# EAGLE board DragonBoard-sub-board-backup (EAGLE 7.6.0)
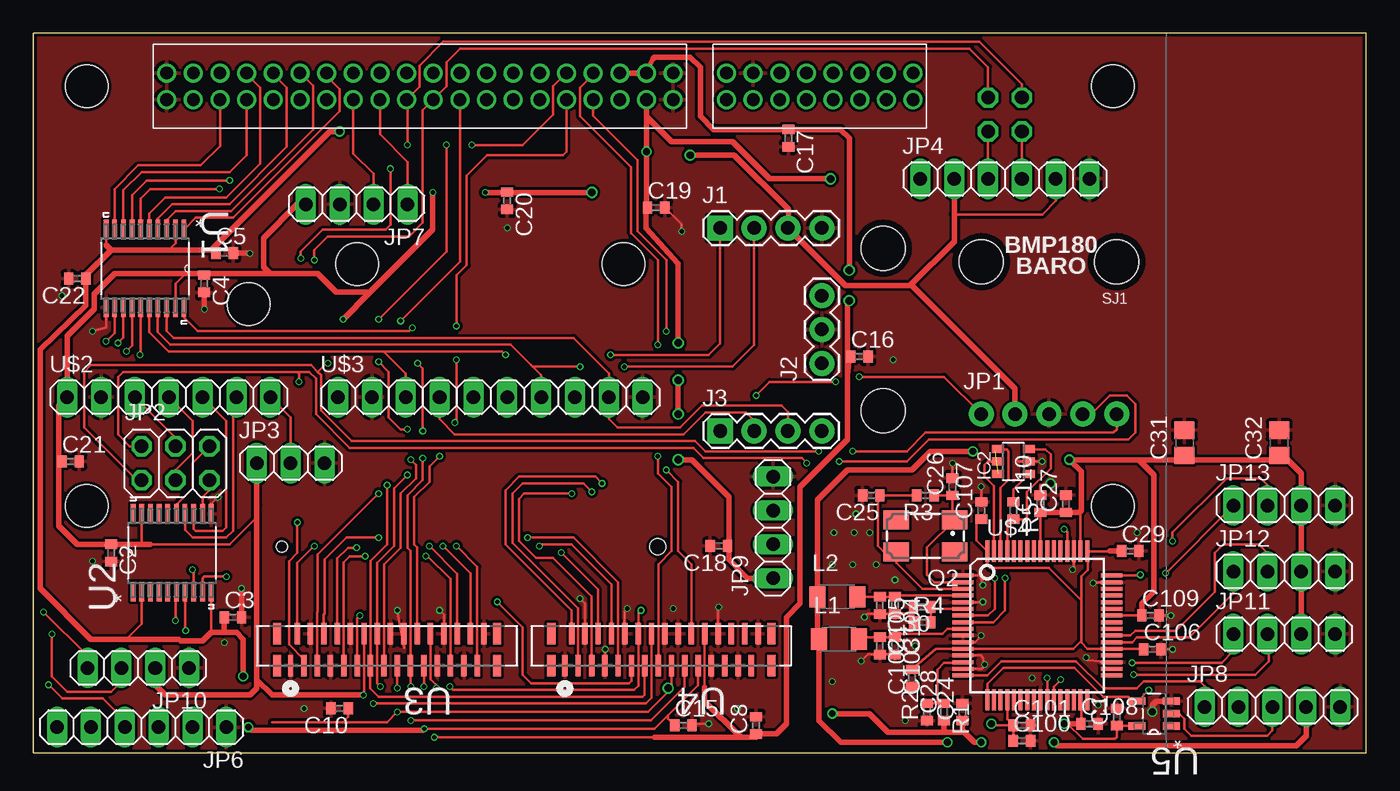
[diagram p0: board, top side]
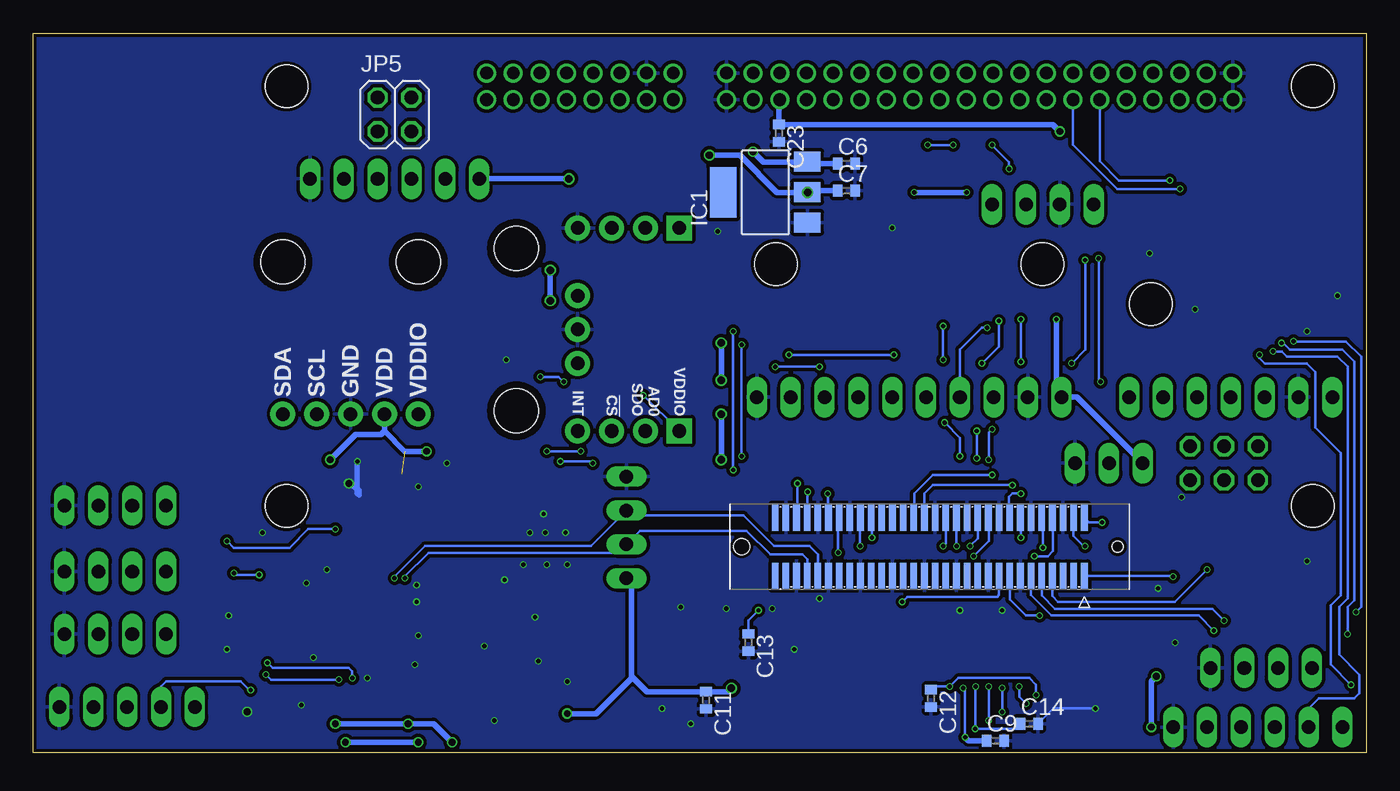
[diagram p1: board, bottom side, seen from below]

Size 100 x 53.98 mm. Coordinates in mm from the lower left corner, seen from the top.
Outline: 0,0 100,0 100,53.98 0,53.98 0,0
Copper layers (1*16): Top 0.035mm / dielectric 1.5mm / Bottom 0.035mm
Design rules "EagleRules-2-Layer-Shep": minimum track width 6mil, minimum drill 12mil, track to track 6mil, track to pad 6mil, pad to pad 6mil, via to via 6mil, smd to smd 0mil, copper to edge 10mil, drill to drill 10mil, minimum pad ring 2mil, minimum via ring 2mil, stop-mask expansion 2mil, vias tented up to drill 100mil, thermal gap 10mil
Net classes: 3 gnd: width 0.152 mm

## Footprints (pad centres in the part's own frame; a part is rotated, then mirrored left to right if it is on the bottom)
C0402 = smd 0.7 x 0.9: 1 -0.65,0; 2 0.65,0
C0805 = smd 1.3 x 1.5: 1 -0.95,0; 2 0.95,0
SOT223 = smd 1.499 x 2.007: 1 -2.261,-3.15; 2 0.025,-3.15; 3 2.311,-3.15 | smd 3.81 x 2.007: 4 0,3.15
SOT23-6 = smd 0.6 x 0.9: 1 -0.95,-1.15; 2 0,-1.15; 3 0.95,-1.15; 4 0.95,1.15; 5 0,1.15; 6 -0.95,1.15
1X04 = drill 1.016 pad 1.88 square: 1 0,0 | drill 1.016 pad 1.88: 2 2.54,0; 3 5.08,0; 4 7.62,0
1X03 = drill 1.016 pad 1.88: 1 0,0; 2 2.54,0; 3 5.08,0
1X05_ROUNDONLY_NOSILK = drill 1.016 pad 1.88: 1 0,0; 2 2.54,0; 3 5.08,0; 4 7.62,0; 5 10.16,0
2X03 = drill 1.016 octagon: 1 -2.54,-1.27; 2 -2.54,1.27; 3 0,-1.27; 4 0,1.27; 5 2.54,-1.27; 6 2.54,1.27
1X03' = drill 1.016 long: 1 -2.54,0; 2 0,0; 3 2.54,0
1X06 = drill 1.016 long: 1 -6.35,0; 2 -3.81,0; 3 -1.27,0; 4 1.27,0; 5 3.81,0; 6 6.35,0
2X02 = drill 1.016 octagon: 1 -1.27,-1.27; 2 -1.27,1.27; 3 1.27,-1.27; 4 1.27,1.27
1X04' = drill 1.016 long: 1 -3.81,0; 2 -1.27,0; 3 1.27,0; 4 3.81,0
1X05 = drill 1.016 long: 1 -5.08,0; 2 -2.54,0; 3 0,0; 4 2.54,0; 5 5.08,0
L3216C = smd 1.2 x 1.6: 1 -1.5,0; 2 1.5,0
CTS406 = smd 1.9 x 1.4: 1 -2.2,-1.2; 2 2.2,-1.2; 3 2.2,1.2; 4 -2.2,1.2
R0402 = smd 0.7 x 0.9: 1 -0.65,0; 2 0.65,0
STAND-OFF = hole 3.302: 0,0
SOP65P640X120-20N = smd 1.473 x 0.356: 1 -2.921,2.921; 2 -2.921,2.286; 3 -2.921,1.626; 4 -2.921,0.965; 5 -2.921,0.33; 6 -2.921,-0.33; 7 -2.921,-0.965; 8 -2.921,-1.626; 9 -2.921,-2.286; 10 -2.921,-2.921; 11 2.921,-2.921; 12 2.921,-2.286; 13 2.921,-1.626; 14 2.921,-0.965; 15 2.921,-0.33; 16 2.921,0.33; 17 2.921,0.965; 18 2.921,1.626; 19 2.921,2.286; 20 2.921,2.921
FCI_62674-301121ALF = smd 0.406 x 1.6: 1 0,4.775; 2 -0.508,2.388; 3 -0.991,4.775; 4 -1.499,2.388; 5 -2.007,4.775; 6 -2.489,2.388; 7 -2.997,4.775; 8 -3.505,2.388; 9 -3.988,4.775; 10 -4.496,2.388; 11 -5.004,4.775; 12 -5.512,2.388; 13 -5.994,4.775; 14 -6.502,2.388; 15 -7.01,4.775; 16 -7.493,2.388; 17 -8.001,4.775; 18 -8.509,2.388; 19 -8.992,4.775; 20 -9.5,2.388; 21 -10.008,4.775; 22 -10.49,2.388; 23 -10.998,4.775; 24 -11.506,2.388; 25 -11.989,4.775; 26 -12.497,2.388; 27 -13.005,4.775; 28 -13.487,2.388; 29 -13.995,4.775; 30 -14.503,2.388 | smd 0.61 x 1.6: 31 -15.494,2.388; 32 1.016,2.388; 33 -15.494,4.775; 34 1.016,4.775
SOT95P280X145-5N = smd 1.27 x 0.559: 1 -1.295,0.94; 2 -1.295,0; 3 -1.295,-0.94; 4 1.295,-0.94; 5 1.295,0.94
DROGENBOARD-TH = drill 0.95: A1 52,49; A2 52,51; A3 54,49; A4 54,51; A5 56,49; A6 56,51; A7 58,49; A8 58,51; A9 60,49; A10 60,51; A11 62,49; A12 62,51; A13 64,49; A14 64,51; A15 66,49; A16 66,51; LS1 10,49; LS2 10,51; LS3 12,49; LS4 12,51; LS5 14,49; LS6 14,51; LS7 16,49; LS8 16,51; LS9 18,49; LS10 18,51; LS11 20,49; LS12 20,51; LS13 22,49; LS14 22,51; LS15 24,49; LS16 24,51; LS17 26,49; LS18 26,51; LS19 28,49; LS20 28,51; LS21 30,49; LS22 30,51; LS23 32,49; LS24 32,51; LS25 34,49; LS26 34,51; LS27 36,49; LS28 36,51; LS29 38,49; LS30 38,51; LS31 40,49; LS32 40,51; LS33 42,49; LS34 42,51; LS35 44,49; LS36 44,51; LS37 46,49; LS38 46,51; LS39 48,49; LS40 48,51 | smd 0.5 x 2 bottom: HS1 21.15,13.25; HS2 21.15,17.65; HS3 21.95,13.25; HS4 21.95,17.65; HS5 22.75,13.25; HS6 22.75,17.65; HS7 23.55,13.25; HS8 23.55,17.65; HS9 24.35,13.25; HS10 24.35,17.65; HS11 25.15,13.25; HS12 25.15,17.65; HS13 25.95,13.25; HS14 25.95,17.65; HS15 26.75,13.25; HS16 26.75,17.65; HS17 27.55,13.25; HS18 27.55,17.65; HS19 28.35,13.25; HS20 28.35,17.65; HS21 29.15,13.25; HS22 29.15,17.65; HS23 29.95,13.25; HS24 29.95,17.65; HS25 30.75,13.25; HS26 30.75,17.65; HS27 31.55,13.25; HS28 31.55,17.65; HS29 32.35,13.25; HS30 32.35,17.65; HS31 33.15,13.25; HS32 33.15,17.65; HS33 33.95,13.25; HS34 33.95,17.65; HS35 34.75,13.25; HS36 34.75,17.65; HS37 35.55,13.25; HS38 35.55,17.65; HS39 36.35,13.25; HS40 36.35,17.65; HS41 37.15,13.25; HS42 37.15,17.65; HS43 37.95,13.25; HS44 37.95,17.65; HS45 38.75,13.25; HS46 38.75,17.65; HS47 39.55,13.25; HS48 39.55,17.65; HS49 40.35,13.25; HS50 40.35,17.65; HS51 41.15,13.25; HS52 41.15,17.65; HS53 41.95,13.25; HS54 41.95,17.65; HS55 42.75,13.25; HS56 42.75,17.65; HS57 43.55,13.25; HS58 43.55,17.65; HS59 44.35,13.25; HS60 44.35,17.65 | hole 0.85: 18.65,15.45 | hole 1.215: 46.85,15.45 | hole 3.2: 4,18.5; 4,50; 81,18.5; 81,50
BURO = drill 1.016 long: 1 -7.62,0; 2 -5.08,0; 3 -2.54,0; 4 0,0; 5 2.54,0; 6 5.08,0; 7 7.62,0 | hole 3.2: 6,7
IMU = drill 1.016 long: 1 -11.43,0; 2 -8.89,0; 3 -6.35,0; 4 -3.81,0; 5 -1.27,0; 6 1.27,0; 7 3.81,0; 8 6.35,0; 9 8.89,0; 10 11.43,0 | hole 3.2: 10,10; -10,10
LQFP-64 = smd 0.3 x 1.6: 1 -3.25,-5.825; 2 -2.75,-5.825; 3 -2.25,-5.825; 4 -1.75,-5.825; 5 -1.25,-5.825; 6 -0.75,-5.825; 7 -0.25,-5.825; 8 0.25,-5.825; 9 0.75,-5.825; 10 1.25,-5.825; 11 1.75,-5.825; 12 2.25,-5.825; 13 2.75,-5.825; 14 3.25,-5.825; 15 3.75,-5.825; 16 4.25,-5.825; 33 4.25,5.325; 34 3.75,5.325; 35 3.25,5.325; 36 2.75,5.325; 37 2.25,5.325; 38 1.75,5.325; 39 1.25,5.325; 40 0.75,5.325; 41 0.25,5.325; 42 -0.25,5.325; 43 -0.75,5.325; 44 -1.25,5.325; 45 -1.75,5.325; 46 -2.25,5.325; 47 -2.75,5.325; 48 -3.25,5.325 | smd 1.6 x 0.3: 17 6.075,-4; 18 6.075,-3.5; 19 6.075,-3; 20 6.075,-2.5; 21 6.075,-2; 22 6.075,-1.5; 23 6.075,-1; 24 6.075,-0.5; 25 6.075,0; 26 6.075,0.5; 27 6.075,1; 28 6.075,1.5; 29 6.075,2; 30 6.075,2.5; 31 6.075,3; 32 6.075,3.5; 49 -5.075,3.5; 50 -5.075,3; 51 -5.075,2.5; 52 -5.075,2; 53 -5.075,1.5; 54 -5.075,1; 55 -5.075,0.5; 56 -5.075,0; 57 -5.075,-0.5; 58 -5.075,-1; 59 -5.075,-1.5; 60 -5.075,-2; 61 -5.075,-2.5; 62 -5.075,-3; 63 -5.075,-3.5; 64 -5.075,-4

## Placement (x,y rotation side)
C1  0.1uF  [C0402]  81.28,2.67 90 top
C2  0.1Uf  [C0402]  5.84,14.99 270 top
C3  0.1Uf  [C0402]  14.99,10.16 0 top
C4  0.1uF  [C0402]  12.83,35.18 270 top
C5  0.1uF  [C0402]  14.35,37.47 0 top
C6  1uF  [C0402]  38.99,44.2 0 bottom
C7  1uF  [C0402]  38.99,42.16 0 bottom
C8  0.1uF  [C0402]  54.23,2.03 90 top
C9  0.1uF  [C0402]  27.81,0.89 0 bottom
C10  0.1uF  [C0402]  22.99,3.3 180 top
C11  0.1uF  [C0402]  49.53,3.94 270 bottom
C12  0.1uF  [C0402]  32.64,4.06 270 bottom
C13  0.1uF  [C0402]  46.35,8.26 270 bottom
C14  0.1uF  [C0402]  25.27,2.16 0 bottom
C15  0.1uF  [C0402]  48.77,2.03 0 top
C16  0.1uF  [C0402]  61.98,29.72 0 top
C17  0.1uF  [C0402]  56.64,46.1 270 top
C18  0.1uF  [C0402]  51.44,15.49 180 top
C19  0.1uF  [C0402]  46.74,40.89 0 top
C20  0.1uF  [C0402]  35.56,41.4 270 top
C21  0.1uF  [C0402]  2.79,21.84 0 top
C22  0.1uF  [C0402]  3.3,35.56 180 top
C23  0.1uF  [C0402]  44.07,46.48 270 bottom
C24  0.1uF  [C0402]  69.72,3.05 90 top
C25  30pF  [C0402]  62.87,19.3 180 top
C26  30pF  [C0402]  68.96,19.94 90 top
C27  4.7uF  [C0402]  77.47,18.67 90 top
C28  0.1uF  [C0402]  65.91,5.59 270 top
C29  4.7uF  [C0402]  82.3,15.11 0 top
C30  0.1uF  [C0402]  66.67,10.92 180 top
C31  0.1uF  [C0805]  86.36,23.24 90 top
C32  0.1uF  [C0805]  93.47,23.24 90 top
C100  0.1uF  [C0402]  74.17,0.89 0 top
C101  4.7uF  [C0402]  74.17,2.03 0 top
C102  0.1uF  [C0402]  63.5,8 270 top
C103  4.7uF  [C0402]  64.64,8 270 top
C104  0.1uF  [C0402]  64.64,11.05 270 top
C105  4.7uF  [C0402]  63.5,11.05 270 top
C106  0.1uF  [C0402]  83.95,7.75 0 top
C107  0.1uF  [C0402]  71.12,18.16 90 top
C108  0.1uF  [C0402]  79.25,2.16 0 top
C109  0.1uF  [C0402]  83.82,10.29 0 top
C110  0.1uF  [C0402]  75.56,18.67 90 top
IC1  REG1117  [SOT223]  45.09,42.04 90 bottom
IC2  93AA76A  [SOT23-6]  73.53,21.84 90 top
J1  [1X04]  51.54,39.37 0 top
J2  [1X03]  59.16,29.21 90 top
J3  [1X04]  51.54,24.13 0 top
JP1  [1X05_ROUNDONLY_NOSILK]  71.12,25.4 0 top
JP2  [2X03]  10.67,21.72 0 top
JP3  [1X03']  19.3,21.72 0 top
JP4  [1X06]  72.9,43.05 0 top
JP5  [2X02]  72.9,47.88 0 bottom
JP6  [1X06]  8.13,1.91 180 top
JP7  [1X04']  24.26,41.15 180 top
JP8  [1X05]  92.96,3.43 0 top
JP9  [1X04']  55.5,16.89 90 top
JP10  [1X04']  7.87,6.35 180 top
JP11  [1X04']  93.85,8.89 0 top
JP12  [1X04']  93.85,13.59 0 top
JP13  [1X04']  93.85,18.54 0 top
L1  0.1uH  [L3216C]  60.45,8.51 0 top
L2  0.1uH  [L3216C]  60.33,11.68 0 top
Q2  12MHz  [CTS406]  66.93,16.26 180 top
R1  1K  [R0402]  68.33,3.05 270 top
R2  100k  [R0402]  67.06,3.05 90 top
R3  100k  [R0402]  66.93,19.3 180 top
R4  12k  [R0402]  66.67,9.78 0 top
R5  22k  [R0402]  73.53,18.16 270 top
STANDOFF1  STAND-OFF  [STAND-OFF]  81.28,36.83 0 top
STANDOFF2  STAND-OFF  [STAND-OFF]  71.12,36.83 0 top
STANDOFF3  STAND-OFF  [STAND-OFF]  63.75,25.65 0 top
STANDOFF4  STAND-OFF  [STAND-OFF]  63.75,37.85 0 top
U1  TXB0108PWR  [SOP65P640X120-20N]  8.38,36.32 270 top
U2  TXB0108PWR  [SOP65P640X120-20N]  10.41,14.99 90 top
U3  62674-301121ALF  [FCI_62674-301121ALF]  19.3,11.3 180 top
U4  62674-301121ALF  [FCI_62674-301121ALF]  39.88,11.3 180 top
U5  NC7ST04M5X  [SOT95P280X145-5N]  84.07,2.92 180 top
U$1  DRAGON-BOARD-TH  [DROGENBOARD-TH]  0,0 0 top
U$2  GY-63  [BURO]  10.16,26.67 0 top
U$3  GY-9250  [IMU]  34.29,26.67 0 top
U$4  FT423H  [LQFP-64]  75.56,10.03 270 top

## Library data of the parts
C1-C32 C100-C110 L1 L2 R1-R5 = rcl
IC1 = burr-brown; MPN: REG1117; OC_FARNELL: 1097566; OC_NEWARK: 14P6981
IC2 = microchip; MPN: 93AA76AT-I/OT; OC_FARNELL: 1331443; OC_NEWARK: 35M2481
J1 J3 = SparkFun-Connectors; PROD_ID: CONN-09696
J2 = SparkFun-Connectors
JP1 = mike-temp
JP2-JP13 = pinhead
Q2 = crystal; OC_FARNELL: unknown; OC_NEWARK: unknown
STANDOFF1-STANDOFF4 = SparkFun-Electromechanical
U1 U2 = Texas Instruments_By_element14_Batch_1; MPN: TXB0108PWR; OC_FARNELL: 1494945; OC_NEWARK: 27M1151; PACKAGE: TSSOP-20; SUPPLIER: Texas Instruments
U3 U4 = 62674-301121ALF; MPN: 62674-301121ALF; OC_FARNELL: 1830632; OC_NEWARK: 03M2163; PACKAGE: CONN-30POS; SUPPLIER: FCI
U5 = pca9685; MPN: NC7ST04M5X; OC_FARNELL: -; OC_NEWARK: 38C7556; PACKAGE: SOT-23-5; SUPPLIER: Fairchild
U$1 = DragonBoard
U$2 U$3 = imu
U$4 = FT432H

## Nets
+1.8V: C3.1 C5.1 C14.1 C15.1 C22.1 C23.1 U1.2 U1.10 U2.2 U2.10 U3.21 U4.21 U$1.LS35
+3.3V: C1.1 C2.1 C4.1 C7.1 C12.1 C13.1 C20.1 C21.1 C27.1 C31.1 C32.1 C100.1 C101.1 C108.1 C109.1 C110.1 IC1.2 IC2.6 J1.3 JP1.2 JP3.1 JP4.2 JP4.5 JP7.4 JP10.2 JP11.3 JP12.3 JP13.3 L1.1 L2.1 U1.19 U2.19 U3.12 U4.12 U5.5 U$2.1 U$3.1 U$4.20 U$4.31 U$4.42 U$4.50 U$4.56
+5V: C6.1 C10.1 C11.1 C18.1 C19.1 C24.1 IC1.3 JP4.1 JP8.4 JP9.1 R1.2 U3.17 U4.17 U$1.LS37
ADBUS_RX: JP8.2 U5.4 U$4.17
ADBUS_TX: JP8.1 U$4.16
AUX_CL: J2.1
AUX_DA: J2.3
BDBUS_RX: JP11.2 U$4.27
BDBUS_TX: JP11.1 U$4.26
CAM_SCL: U3.13 U4.13 U$1.HS32
CAM_SDA: U3.14 U4.14 U$1.HS34
CDBUS_RX: JP12.2 U$4.39
CDBUS_TX: JP12.1 U$4.38
CDC_HPH_L: U$1.A10
CDC_HPH_R: U$1.A8
CDC_HPH_REF: U$1.A9
CDC_HS_DET: U$1.A11
CDC_MIC2_P: U$1.A6
CDC_MIC3_P: U$1.A7
CDC_MIC_BIAS1: U$1.A12
CON_RX: JP6.4 U1.15
CON_TX: JP6.5 U1.14
CSI0_C+: U3.3 U$1.HS2
CSI0_C-: U3.2 U$1.HS4
CSI0_D0+: U3.9 U$1.HS8
CSI0_D0-: U3.8 U$1.HS10
CSI0_D1+: U3.6 U$1.HS14
CSI0_D1-: U3.5 U$1.HS16
CSI0_D2+: U3.25 U$1.HS20
CSI0_D2-: U3.26 U$1.HS22
CSI0_D3+: U3.28 U$1.HS26
CSI0_D3-: U3.29 U$1.HS28
CSI1_C+: U4.3 U$1.HS54
CSI1_C-: U4.2 U$1.HS56
CSI1_D0+: U4.9 U$1.HS42
CSI1_D0-: U4.8 U$1.HS44
CSI1_D1+: U4.6 U$1.HS48
CSI1_D1-: U4.5 U$1.HS50
DDBUS_RX: JP13.2 U$4.52
DDBUS_TX: JP13.1 U$4.48
DSI_BLCTRL: U$1.LS28
DSI_CLK+: U$1.HS21
DSI_CLK-: U$1.HS23
DSI_D0+: U$1.HS27
DSI_D0-: U$1.HS29
DSI_D1+: U$1.HS33
DSI_D1-: U$1.HS35
DSI_D2+: U$1.HS39
DSI_D2-: U$1.HS41
DSI_D3+: U$1.HS45
DSI_D3-: U$1.HS47
EECLK: IC2.4 U$4.62
EECS: IC2.5 U$4.63
EEDATA: IC2.3 R5.2 U$4.61
FLASH: U3.19 U4.19 U$1.LS23
GND: C1.2 C2.2 C3.2 C4.2 C5.2 C6.2 C7.2 C8.2 C9.2 C10.2 C11.2 C12.2 C13.2 C14.2 C15.2 C16.2 C17.2 C18.2 C19.2 C20.2 C21.2 C22.2 C23.2 C24.2 C25.2 C26.2 C27.2 C28.2 C29.2 C30.2 C31.2 C32.2 C100.2 C101.2 C102.2 C103.2 C104.2 C105.2 C106.2 C107.2 C108.2 C109.2 C110.2 IC1.1 IC2.2 J1.4 J2.2 JP1.3 JP3.3 JP4.6 JP6.1 JP7.3 JP8.5 JP9.4 JP10.1 JP11.4 JP12.4 JP13.4 R2.1 R4.1 U1.11 U2.11 U3.1 U3.4 U3.7 U3.10 U3.16 U3.18 U3.23 U3.24 U3.27 U3.30 U4.1 U4.4 U4.7 U4.10 U4.16 U4.18 U4.23 U4.24 U4.27 U4.30 U5.3 U$1.A4 U$1.HS6 U$1.HS12 U$1.HS13 U$1.HS18 U$1.HS19 U$1.HS24 U$1.HS25 U$1.HS30 U$1.HS31 U$1.HS37 U$1.HS43 U$1.HS46 U$1.HS49 U$1.HS52 U$1.HS55 U$1.HS58 U$1.LS1 U$1.LS2 U$1.LS39 U$1.LS40 U$2.2 U$3.2 U$3.10 U$4.1 U$4.5 U$4.10 U$4.11 U$4.13 U$4.15 U$4.25 U$4.35 U$4.47 U$4.51
GND_CFILT: U$1.A5
GPIO_12: U$1.LS24
GPIO_13: U$1.LS25
GPIO_24: U$1.LS29
GPIO_25: U$1.LS30
GPIO_69: U$1.LS26
GPIO_110: U$1.LS16
GPIO_113: U$1.LS18
GPIO_114: U$1.LS20
GPIO_115: U$1.LS27
HSIC_DATA: U$1.HS59
HSIC_STR: U$1.HS57
I2C0_SCL: JP7.2 U$1.LS15
I2C0_SDA: JP7.1 U$1.LS17
I2C1_SCL: JP1.4 JP2.2 JP5.2 U$1.LS19
I2C1_SDA: JP1.5 JP2.1 JP5.4 U$1.LS21
I2C3_SCL: U$1.HS36
I2C3_SDA: U$1.HS38
INT: J3.4
MCLK0: U3.11 U$1.HS15
MCLK1: U4.11 U$1.HS17
N$1: JP3.2 U$2.7
N$2: JP2.3 U$2.4
N$3: JP2.4 U$2.3
N$4: JP4.4 JP5.1
N$5: JP4.3 JP5.3
N$6: C30.1 R4.2 U$4.6
N$7: C26.1 Q2.1 R3.1 U$4.2
N$8: U$3.5
N$9: U$1.A15
N$10: U$3.6
N$11: C25.1 Q2.3 R3.2 U$4.3
N$12: U$3.8
N$14: IC2.1 R5.1
N$17: R1.1 R2.2 U$4.14
ON: U$1.LS4
RESET0: U3.20 U$1.LS31
RESET1: U4.20 U$1.LS33
RESIN: U$1.LS6
SBUS: JP8.3 U5.2
SPI0_CLK: U1.5 U$1.LS8
SPI0_CS_N: U1.3 U$1.LS12
SPI0_MISO: U1.4 U$1.LS10
SPI0_MOSI: U1.1 U$1.LS14
SPI1_CLK: U2.6 U$1.HS9
SPI1_CS: U2.8 U$1.HS7
SPI1_MISO: U2.7 U$1.HS11
SPI1_MOSI: U2.9 U$1.HS1
SPI_A_CLK: J1.1 U1.16 U$3.3
SPI_A_CS: J3.3 U1.18 U$3.9
SPI_A_MISO: J1.2 U1.17 U$3.7
SPI_A_MOSI: J3.2 U1.20 U$3.4
SPI_B_CLK: JP2.6 U2.15
SPI_B_CS: U2.13 U$2.5
SPI_B_MISO: U2.14 U$2.6
SPI_B_MOSI: JP2.5 U2.12
SPKR_OUT_M: U$1.A2
SPKR_OUT_P: U$1.A1
STANDBY0: U3.15 U$1.LS32
STANDBY1: U4.15 U$1.LS34
SYS_DCIN: C8.1 C9.1 C16.1 C17.1 U3.22 U4.22 U$1.LS36 U$1.LS38
TLE_RX: JP10.3 U1.13
TLE_TX: JP10.4 U1.12
UART0_CTS: U$1.LS3
UART0_RX: U1.8 U$1.LS7
UART0_TX: U1.9 U$1.LS5
UART1_RX: U1.6 U$1.LS13
UART1_TX: U1.7 U$1.LS11
UART_RTS: U$1.LS9
USB_D+: JP9.3 U$1.HS51 U$4.8
USB_D-: JP9.2 U$1.HS53 U$4.7
VCORE: C28.1 C29.1 C106.1 C107.1 U$4.12 U$4.37 U$4.49 U$4.64
VDDIO: J3.1 JP1.1
VPH_PWR: U$1.A3
VPHY: C104.1 C105.1 L2.2 U$4.4
VPLL: C102.1 C103.1 L1.2 U$4.9

## Tracks (layer width: path | path; a pad name or v marks a point on that pad's centre or on a via)
+1.8V  (via drill 0.33, 0.51)
  Top 0.203: U3.21 v29.31,4.95 | U4.21 49.89,5.05 47.62,2.79 | 47.62,2.79 46.61,1.78 v29.34,1.78 | U2.10 13.34,9.02 | U1.10 5.46,38.1 | U1.2 10.67,38.23 10.16,37.72 | 7.11,8.51 6.99,8.51 8.13,9.65 U2.2 | C15.1 47.62,2.52 47.62,2.79 | C22.1 3.94,35.58 3.94,35.69
  Top 0.406: 13.34,37.72 13.46,37.72 C5.1 | 5.84,37.72 10.16,37.72 11.94,37.72 13.34,37.72 | 5.46,38.1 5.84,37.72 | 5.84,37.72 3.94,35.81 3.94,35.69 3.94,33.53 0.51,30.23 0.51,12.32 4.32,8.51 7.11,8.51 10.92,8.51 11.05,8.38 12.7,8.38 13.34,9.02 14.22,9.02 | v29.34,1.78 29.21,1.65 16.38,1.65 v16.13,1.91 | v15.75,5.71 15.75,8.51 15.24,9.02 14.22,9.02 | C3.1 14.34,9.13 14.22,9.02 | v22.99,46.61 22.23,46.61 13.34,37.72
  Bottom 0.203: v29.31,4.95 29.34,4.93 v29.34,1.78 26.3,1.78 C14.1
  Bottom 0.406: v16.13,1.91 16.13,5.33 v15.75,5.71 | U$1.LS35 44.07,48.93 C23.1 23.51,47.13 v22.99,46.61
+3.3V  (via drill 0.33, 0.51, 0.56)  (1 unrouted)
  Top 0.203: v31.24,4.95 31.5,4.7 45.09,4.7 45.39,5 U4.12 45.39,10.46 v45.59,10.67 | U3.12 24.82,4.37 v24.77,4.32 | 8.76,15.62 14.73,15.62 16.76,17.65 16.76,18.54 | 8.13,15.62 U2.19 | U1.19 10.67,35.18 11.43,35.94 11.81,35.94 | 69.09,40.39 75.69,40.39 76.71,41.4 JP4.5 | C21.1 2.02,21.97 1.91,21.97 | C20.1 35.55,42.04 35.31,42.04 | C110.1 U$4.56 | U$4.42 C109.1 | U$4.31 78.61,3.91 78.61,2.05 C108.1 | U$4.20 73.06,2.48 C101.1 | C100.1 C101.1 | U5.5 82.74,2.02 C1.1 81.28,1.14 81.15,1.02 78.74,1.02 77.6,2.16 v77.34,2.16 | U$4.50 78.56,18.24 78.61,18.29 | C101.1 72.01,2.03 v71.88,2.16
  Top 0.406: JP1.2 73.66,27.3 65.91,35.05 65.79,35.05 | 65.79,35.05 60.94,35.05 J1.3 56.64,39.4 56.64,40.77 52.58,44.83 v49.28,44.83 | v41.91,42.04 35.31,42.04 v33.91,42.04 | v29.97,42.04 29.97,39.24 25.21,34.48 | 25.21,34.48 v23.24,32.51 | 12.57,35.94 11.81,35.94 6.1,35.94 4.57,34.42 4.57,33.27 2.54,31.24 U$2.1 1.91,26.04 1.91,21.97 1.91,17.02 3.3,15.62 5.84,15.62 | 12.57,35.94 17.78,35.94 | 17.78,35.94 21.34,35.94 22.73,34.54 25.15,34.54 25.21,34.48 | 16.76,5.46 17.91,4.32 v24.77,4.32 | 16.76,5.46 16.76,18.54 JP3.1 | JP4.2 69.09,40.39 69.09,38.35 65.79,35.05 | 8.76,15.62 8.13,15.62 5.84,15.62 | JP7.4 19.81,41.15 17.27,38.61 17.27,36.45 17.78,35.94 | C2.1 5.84,15.62 | C4.1 12.69,35.83 12.57,35.94 | 16.76,5.46 16.76,4.83 16.26,4.32 9.91,4.32 9.14,5.08 JP10.2 | C109.1 83.19,10.27 83.19,11.18 84.07,12.06 84.07,20.83 82.93,21.97 | 73.39,0.76 C100.1 | C108.1 v77.34,2.16 | 82.93,21.97 v77.72,21.97 78.61,21.08 78.61,18.29 78.61,18.16 78.47,18.02 C27.1 C110.1 | v70.48,22.61 67.31,22.61 65.91,21.21 61.09,21.21 58.83,18.95 L2.1 58.83,8.64 L1.1 58.95,2.39 60.58,0.76 v68.58,0.76 | JP11.3 JP12.3 JP13.3 95.12,20.95 94.11,21.97 | 94.11,21.97 86.36,21.97 | 86.36,21.97 82.93,21.97 | C31.1 86.36,21.97 | 94.11,21.97 93.79,22.29 C32.1
  Bottom 0.203: v24.77,4.32 24.77,5.08 25.27,5.59 30.61,5.59 v31.24,4.95 32.4,4.95 C12.1 | C13.1 46.35,9.91 v45.59,10.67
  Bottom 0.406: IC1.2 v41.91,42.04 | v33.91,42.04 v29.97,42.04 | v23.24,32.51 23.24,27.05 U$3.1 21.72,26.67 JP3.1 | v41.91,42.04 44.2,42.04 46.99,44.83 v49.28,44.83 | C7.1 41.78,42.16 v41.91,42.04 | v77.34,2.16 v71.88,2.16 69.98,2.16 v68.58,0.76 | JP1.2 73.66,24.13 | 73.66,24.13 73.91,23.88 75.82,23.88 v77.72,21.97 | v70.48,22.61 72.14,22.61 73.66,24.13
+5V  (via drill 0.33, 0.51, 0.56)
  Top 0.203: U3.17 v27.3,4.83 | U4.17 47.88,5.08 v47.62,4.83 47.62,4.57 46.1,3.05 v27.3,3.05 26.54,2.29 23.24,2.29 | C10.1 23.64,2.68 23.24,2.29 | 23.24,2.29 17.91,2.29 | C19.1 45.97,41.01
  Top 0.406: 45.97,41.02 45.97,41.01 | 45.97,41.01 45.97,39.37 48.39,36.7 v48.39,30.73 | v48.39,27.94 v48.39,25.4 | v48.39,21.97 49.4,21.97 52.2,19.18 52.2,15.49 | v59.82,43.05 55.24,43.05 52.45,45.85 47.88,45.85 46,47.73 | 52.2,15.49 52.2,14.48 53.59,13.08 JP9.1 | C18.1 52.2,15.49 | JP8.4 95.5,1.27 94.74,0.51 76.83,0.51 v76.58,0.76 | v71.12,0.76 70.61,0.76 69.85,1.52 | 69.85,1.52 69.72,1.65 C24.1 | v59.94,2.92 62.74,2.92 64.14,1.52 68.45,1.52 | 68.45,1.52 69.85,1.52 | R1.2 68.33,1.65 68.45,1.52 | 46,47.73 46,48.01 U$1.LS37 | 45.97,41.01 46,41.03 v46,45.09 46,47.73
  Bottom 0.203: v27.3,3.05 v27.3,4.83 | C11.1 49.52,4.57 48.9,4.57
  Bottom 0.406: v48.39,30.73 v48.39,27.94 | v48.39,25.4 v48.39,21.97 | v47.62,4.83 47.88,4.57 48.9,4.57 53.98,4.57 55.05,5.65 | JP4.1 v59.82,43.05 | C6.1 41.78,44.2 IC1.3 41.96,44.32 45.21,44.32 46,45.11 v46,45.09 | 55.05,5.65 55.12,5.71 55.12,12.7 JP9.1 | v59.94,2.92 57.78,2.92 55.05,5.65 | v76.58,0.76 v71.12,0.76
ADBUS_RX  (via drill 0.33)
  Top 0.203: U$4.17 71.56,5.14 72.77,6.35 78.11,6.35 80.26,4.19 82.17,4.19 82.5,3.86 U5.4 82.86,3.86 v83.69,4.7
  Bottom 0.203: v83.69,4.7 83.82,4.7 84.45,5.33 90.04,5.33 90.42,4.95 JP8.2
ADBUS_TX
  Top 0.203: U$4.16 71.57,5.78 72.64,6.86 78.23,6.86 80.26,4.83 82.8,4.83 83.31,5.33 87.5,5.33 87.88,4.95 JP8.1
BDBUS_RX  (via drill 0.33)
  Top 0.203: U$4.27 76.56,4.94 v77.09,5.46 | v82.55,5.84 91.69,5.84 92.71,6.86 92.71,8.76 JP11.2
  Bottom 0.203: v77.09,5.46 82.17,5.46 v82.55,5.84
BDBUS_TX  (via drill 0.33)
  Top 0.203: U$4.26 76.06,5.45 v76.07,5.59 | v82.42,6.73 89.15,6.73 90.04,7.62 JP11.1
  Bottom 0.203: v76.07,5.59 76.07,6.1 76.33,6.35 82.04,6.35 v82.42,6.73
CAM_SCL  (via drill 0.33)
  Top 0.203: v26.54,20.07 26.54,15.62 25.3,14.38 U3.13 25.27,6.5 25.27,4.83 25.91,4.19 45.72,4.19 45.87,4.34 U4.13
  Bottom 0.203: v26.54,20.07 32.51,20.07 33.15,19.43 U$1.HS32
CAM_SDA  (via drill 0.33)
  Top 0.203: v28.07,20.83 27.05,19.81 27.05,15.49 25.81,14.25 U3.14 25.81,5.18 v26.04,4.95 | U4.14 46.38,4.09 45.97,3.68 v25.53,3.68
  Bottom 0.203: v28.07,20.83 32.51,20.83 33.91,19.43 33.91,17.69 U$1.HS34 | v26.04,4.95 26.04,4.19 v25.53,3.68
CDBUS_RX
  Top 0.203: U$4.39 82.32,8.78 82.68,9.14 85.72,9.14 88.65,12.06 88.65,14.99 89.28,15.62 91.95,15.62 92.58,14.99 JP12.2
CDBUS_TX
  Top 0.203: U$4.38 82.45,8.28 82.8,8.64 86.74,8.64 90.04,11.94 JP12.1
CON_RX  (via drill 0.33)
  Top 0.203: U1.15 8.05,29.9 v8,29.84 | JP6.4 6.86,2.41 5.21,4.06 2.16,4.06 v1.14,5.08
  Bottom 0.203: v8,29.84 8,29.59 7.62,29.21 4.45,29.21 3.81,28.57 3.81,24.38 1.91,22.48 1.91,11.81 2.67,11.05 2.67,6.6 v1.14,5.08
CON_TX  (via drill 0.33)
  Top 0.203: U1.14 7.42,30.53 v6.99,30.1
  Bottom 0.203: v6.99,30.1 6.35,30.1 5.97,29.72 2.16,29.72 1.4,28.96 1.4,11.56 2.03,10.92 2.03,7.37 0.51,5.84 0.51,4.45 0.89,4.06 3.56,4.06 4.32,3.3 JP6.5
CSI0_C+  (via drill 0.33)
  Top 0.203: 20.3,6.88 U3.3 20.3,7.01 19.18,8.13 19.18,14.35 19.81,14.99 v19.81,17.27
  Bottom 0.203: v19.81,17.27 20.77,17.27 U$1.HS2
CSI0_C-  (via drill 0.33)
  Top 0.203: U3.2 19.81,14.22 v21.08,15.49
  Bottom 0.203: v21.08,15.49 21.21,15.49 21.97,16.26 21.97,17.63 U$1.HS4
CSI0_D0+  (via drill 0.33)
  Top 0.203: U3.9 23.29,14.28 23.75,14.73 v24.89,14.73
  Bottom 0.203: v24.89,14.73 23.88,14.73 23.5,15.11 23.5,17.59 U$1.HS8
CSI0_D0-  (via drill 0.33)
  Top 0.203: U3.8 22.81,14.55 23.62,15.37 v24.26,15.37
  Bottom 0.203: v24.26,15.37 24.26,17.53 24.26,17.56 U$1.HS10
CSI0_D1+  (via drill 0.33)
  Top 0.203: U3.6 21.79,10.36 21.84,10.41 21.84,14.48 23.5,16.13 v25.91,16.13
  Bottom 0.203: v25.91,16.13 25.91,17.61 U$1.HS14
CSI0_D1-  (via drill 0.33)
  Top 0.203: U3.5 21.31,10.52 21.34,10.54 21.34,14.86 v25.91,19.43
  Bottom 0.203: v25.91,19.43 26.54,19.43 26.8,19.18 26.8,17.7 U$1.HS16
CSI0_D2+  (via drill 0.33)
  Top 0.203: U3.25 31.29,13.03 29.59,14.73 v29.46,14.73
  Bottom 0.203: v29.46,14.73 28.32,15.88 28.32,17.62 U$1.HS20
CSI0_D2-  (via drill 0.33)
  Top 0.203: U3.26 31.8,13.41 v29.72,15.49
  Bottom 0.203: v29.72,15.49 29.15,16.06 U$1.HS22
CSI0_D3+  (via drill 0.33)
  Top 0.203: U3.28 32.79,13.44 v30.73,15.49
  Bottom 0.203: v30.73,15.49 30.73,17.63 U$1.HS26
CSI0_D3-  (via drill 0.33)
  Top 0.203: U3.29 33.3,13.95 v31.75,15.49
  Bottom 0.203: U$1.HS28 31.55,15.69 v31.75,15.49
CSI1_C+  (via drill 0.33)
  Top 0.203: U4.3 40.87,10.82 35.94,15.75 35.94,19.43 36.7,20.19 41.27,20.19 v41.91,19.56
  Bottom 0.203: v41.91,19.56 41.91,17.69 U$1.HS54
CSI1_C-  (via drill 0.33)
  Top 0.203: U4.2 40.39,10.67 35.43,15.62 35.43,19.68 36.45,20.7 42.16,20.7 v42.67,20.19
  Bottom 0.203: v42.67,20.19 42.67,18.03 | 42.67,18.03 42.67,17.73 | U$1.HS56 42.75,17.96 42.67,18.03
CSI1_D0+  (via drill 0.33)
  Top 0.203: U4.9 43.87,12.78 40.51,16.13 v37.08,16.13
  Bottom 0.203: v37.08,16.13 37.08,17.58 U$1.HS42
CSI1_D0-  (via drill 0.33)
  Top 0.203: U4.8 43.38,12.62 40.39,15.62 38.1,15.62 v37.97,15.49
  Bottom 0.203: v37.97,15.49 37.97,17.63 U$1.HS44
CSI1_D1+  (via drill 0.33)
  Top 0.203: U4.6 42.37,12.24 v39.62,14.99
  Bottom 0.203: v39.62,14.99 39.62,17.58 U$1.HS48
CSI1_D1-  (via drill 0.33)
  Top 0.203: U4.5 41.88,11.71 38.99,14.61 37.72,14.61 36.45,15.88 36.45,19.05 36.83,19.43 v40.39,19.43
  Bottom 0.203: v40.39,19.43 40.39,17.69 U$1.HS50
DDBUS_RX  (via drill 0.33)
  Top 0.203: U$4.52 77.56,16.54 v77.34,16.76 | v85.47,15.88 85.47,16.51 89.53,20.57 92.08,20.57 92.58,20.07 JP13.2
  Bottom 0.203: v77.34,16.76 79.38,16.76 80.77,15.37 84.96,15.37 v85.47,15.88
DDBUS_TX  (via drill 0.33)
  Top 0.203: U$4.48 83.01,13.28 v83.06,13.34 | v84.96,13.46 JP13.1
  Bottom 0.203: v83.06,13.34 84.84,13.34 v84.96,13.46
EECLK
  Top 0.203: U$4.62 72.56,19.86 73.15,20.45 73.15,22.61 73.03,22.73 72.44,22.73 IC2.4 72.45,22.86
EECS
  Top 0.203: U$4.63 72.06,20.01 71.37,20.7 71.37,21.59 71.63,21.84 IC2.5
EEDATA
  Top 0.203: U$4.61 73.06,17.04 R5.2 74.41,17.51 74.55,17.65 74.55,19.56 76.33,21.34 76.33,22.35 75.95,22.73 74.74,22.73 IC2.3 74.75,22.86
FLASH  (via drill 0.33)
  Top 0.203: U4.19 48.87,4.93 46.35,2.41 v28.32,2.41 | v28.32,4.95 28.32,6.5 U3.19 28.3,15.14 28.07,15.37 28.07,19.3 29.21,20.45 v29.21,22.1 | v27.56,32.38 32,36.83 U$1.LS23 | v28.83,29.21 29.21,28.83 v29.21,24.13
  Bottom 0.203: v28.32,2.41 v28.32,4.95 | v27.56,32.38 27.56,30.48 v28.83,29.21 | v29.21,22.1 v29.21,24.13
GND  (via drill 0.33, 0.51)
  Top 0.203: U3.24 30.81,10.34 v30.48,10.67 | U3.18 27.81,7.87 v27.3,10.67 | U4.10 44.37,10.59 v44.58,10.79 | U4.7 42.88,7.7 v42.93,7.75 | U4.4 41.38,11.2 v41.02,11.56 | U2.11 13.34,18.67 v13.84,19.18 | U4.24 51.38,10.87 v51.44,10.92 | U1.11 5.46,31.88 v4.45,31.62 | C15.2 49.55,2.16 v50.67,2.16 | C19.2 48.64,39.64 v48.64,39.12 | U$4.35 79.17,6.91 v78.99,7.11 | U$4.15 71.19,6.28 v71.37,6.6 71.25,7.11 71.08,7.28 U$4.13 | 71.1,8.78 v71.12,8.76 70.64,8.28 U$4.11 | U$4.5 71.23,11.28 v71.25,11.3 | U$4.1 71.05,13.28 v71.25,12.57 | U$4.51 78.06,13.8 v77.98,13.72 | U$4.47 79.58,12.78 v79.5,12.7 | C26.2 v68.96,21.72 | C107.2 v71.12,19.94 | 73.79,21.97 73.91,21.84 IC2.2 v75.69,21.84 | C110.2 75.56,20.07 | C106.2 v85.47,7.75 | C109.2 v85.34,10.29 | v62.36,10.16 62.6,10.4 C105.2 C104.2 65.91,10.4 66.03,10.29 | C102.2 C103.2 63.39,7.35 63.37,7.37 62.61,7.37 v62.1,6.86
  Top 0.406: C3.2 15.64,12.3 v15.62,12.32 | C4.2 v12.83,33.27 | C5.2 v16.26,37.47 | U5.3 84.25,3.86 83.95,3.56 v83.95,3.05
  Bottom 0.203: C14.2 23.48,3.3 v20.32,3.3
  Bottom 0.406: v75.69,21.84 75.69,19.45 C110.2 75.56,19.68 v76.33,20.19
  other vias: 48.01,10.79 14.35,8.26 4.45,14.35 35.56,39.37 2.16,34.29 64.52,29.46 52.83,3.3 74.93,5.59 82.8,16.51 61.72,17.91 64.64,12.95 59.94,5.33 65.41,2.41 66.17,8 59.94,14.1 61.47,14.1 63.25,14.1 62.74,16.51 61.59,16.51 60.07,16.51 79.88,3.56
  pour Bottom (isolate 0.254): -2.54,55.88 101.6,55.88 101.6,-7.62 -2.54,-7.62
  pour Top (isolate 0.203): 101.6,-3.81 -3.81,-3.81 -3.81,59.69 101.6,59.69
I2C0_SCL
  Top 0.203: U$1.LS15 24,44.96 25.53,43.43 JP7.2
I2C0_SDA
  Top 0.203: 28.19,41.27 JP7.1 28.07,44.32 26,46.39 U$1.LS17
I2C1_SCL  (via drill 0.33)
  Top 0.203: JP2.2 7.24,22.99 6.35,23.88 6.35,28.19 6.73,28.57 19.81,28.57 | 19.81,28.57 20.7,28.57 21.21,28.07 21.21,25.4 23.75,22.86 49.53,22.86 50.29,22.1 57.66,22.1 v58.04,21.72 | v19.94,27.81 19.94,28.45 19.81,28.57 | 74.17,49.4 JP5.2 74.17,50.16 70.99,53.34 30.73,53.34 28.98,51.56 28.98,49.96 U$1.LS19 28.07,48.93 v28.07,45.59 | v20.07,37.08 20.07,37.59 21.72,39.24 26.42,39.24 26.8,39.62 v26.8,43.81 | JP1.4 79.38,25.4 80.77,26.8 82.04,26.8 82.68,26.16 82.68,24 82.17,23.5 67.18,23.5 65.53,21.84 v60.45,21.84
  Bottom 0.203: v20.07,37.08 20.07,27.94 v19.94,27.81 | v60.45,21.84 58.17,21.84 v58.04,21.72 | v26.8,43.81 26.8,44.32 v28.07,45.59
I2C1_SDA  (via drill 0.33)
  Top 0.203: JP2.1 7.75,20.45 3.81,24.38 3.81,28.57 4.32,29.08 20.83,29.08 21.34,28.57 | 21.34,28.57 21.59,28.32 21.59,25.65 23.88,23.37 49.66,23.37 50.42,22.61 v58.93,22.61 | v22.1,29.21 21.97,29.21 21.34,28.57 | v21.08,36.96 21.08,37.72 22.1,38.73 28.19,38.73 29.21,39.75 29.21,48.21 U$1.LS21 30.99,49.99 30.99,51.82 32,52.83 70.23,52.83 71.63,51.44 JP5.4 | JP1.5 81.28,24.26 81.03,24 66.93,24 65.53,22.61 v61.47,22.61
  Bottom 0.203: v21.08,36.96 21.08,30.23 v22.1,29.21 | v61.47,22.61 v58.93,22.61
MCLK0  (via drill 0.33)
  Top 0.203: U3.11 24.31,10.08 v24.51,10.29
  Bottom 0.203: v24.51,10.29 25.53,10.29 26.75,11.51 U$1.HS15
MCLK1  (via drill 0.33)
  Top 0.203: v34.8,11.3 36.7,9.4 36.7,5.84 37.34,5.21 44.7,5.21 44.88,5.38 U4.11
  Bottom 0.203: v34.8,11.3 34.42,11.68 27.69,11.68 27.55,11.82 U$1.HS17
N$1
  Top 0.203: JP3.2 19.3,25.15 U$2.7
N$2
  Top 0.203: JP2.3 10.67,21.21 11.94,22.48 11.94,24.89 U$2.4
N$3
  Top 0.203: JP2.4 10.67,23.62 U$2.3
N$4
  Top 0.203: JP4.4 JP5.1
N$5
  Top 0.203: JP4.3 JP5.3
N$6
  Top 0.203: U$4.6 67.46,10.78 C30.1 R4.2
N$7
  Top 0.203: U$4.2 67.61,12.78 67.06,13.34 67.06,15.38 Q2.1 68.96,17.62 C26.1 68.95,19.3 R3.1
N$11
  Top 0.203: U$4.3 66.71,12.28 64.77,14.22 64.77,15.02 Q2.3 64.67,15.11 63.75,15.11 63.37,15.49 63.37,19.16 C25.1 R3.2 66.17,19.42
N$14
  Top 0.203: R5.1 73.53,19.74 IC2.1
N$17
  Top 0.203: R1.1 67.82,3.7 | 67.82,3.7 R2.2 | U$4.14 69.69,6.73 68.33,6.73 67.82,6.22 67.82,3.7
RESET0  (via drill 0.33)
  Top 0.203: U3.20 28.8,15.39 28.57,15.62 28.57,19.18 29.72,20.32 29.72,21.46 v30.48,22.23 | v31.62,24.77 31.75,24.89 v31.75,29.46 | v31.75,32 31.75,35.81 32.51,36.58 32.51,43.31 34.04,44.83 39.75,44.83 40.01,45.09 U$1.LS31
  Bottom 0.203: v30.48,22.23 30.48,23.62 v31.62,24.77 | v31.75,29.46 v31.75,32
RESET1  (via drill 0.33)
  Top 0.203: U4.20 49.38,14.12 48.39,15.11 48.39,20.32 v47.5,21.21 | v47.5,31.62 47.5,36.96 45.34,39.12 45.34,44.45 42,47.79 U$1.LS33
  Bottom 0.203: v47.5,21.21 v47.5,31.62
SBUS
  Top 0.203: U5.2 85.98,2.92 86.36,2.54 86.36,1.78 86.87,1.27 92.58,1.27 92.96,1.65 JP8.3
SPI0_CLK
  Top 0.203: U1.5 8.71,40.46 9.91,41.66 14.48,41.66 17.02,44.2 17.02,49.91 16,50.93 U$1.LS8
SPI0_CS_N
  Top 0.203: U1.3 10.03,39.27 10.03,40.01 10.67,40.64 14.86,40.64 20.98,46.74 20.98,50.04 U$1.LS12
SPI0_MISO
  Top 0.203: U1.4 9.35,40.08 10.41,41.15 14.73,41.15 19.02,45.47 19.02,49.91 18,50.96 U$1.LS10
SPI0_MOSI
  Top 0.203: U1.1 12.19,40.13 14.99,40.13 22.99,48.13 22.99,49.78 22,50.77 U$1.LS14
SPI1_CLK  (via drill 0.33)
  Top 0.203: U2.6 10.67,11.99 v10.67,9.91
  Bottom 0.203: v10.67,9.91 11.56,10.79 23.37,10.79 24.35,11.78 U$1.HS9
SPI1_CS  (via drill 0.33)
  Top 0.203: v11.94,13.72 12.04,13.61 U2.8
  Bottom 0.203: v11.94,13.72 14.35,11.3 23.11,11.3 23.55,11.74 U$1.HS7
SPI1_MISO  (via drill 0.33)
  Top 0.203: v11.43,9.14 11.38,9.2 U2.7
  Bottom 0.203: v11.43,9.14 12.57,10.29 23.62,10.29 25.15,11.81 U$1.HS11
SPI1_MOSI  (via drill 0.33)
  Top 0.203: v14.48,13.21 12.83,13.21 12.7,13.08 U2.9
  Bottom 0.203: U$1.HS1 14.52,13.25 v14.48,13.21
SPI_A_CLK  (via drill 0.33)
  Top 0.203: U$3.3 27.94,28.45 26.29,30.1 | J1.1 51.54,30.71 50.67,29.84 v43.31,29.84 | U1.16 8.71,31.55 10.16,30.1 25.02,30.1 26.29,30.1 | v35.43,29.84 35.18,30.1 26.29,30.1
  Bottom 0.203: v43.31,29.84 v35.43,29.84
SPI_A_CS
  Top 0.203: U1.18 10.01,31.65 10.54,31.11 40.51,31.11 43.18,28.45 U$3.9 43.18,25.02 43.81,24.38 48.51,24.38 50.16,26.04 56.13,26.04 56.62,25.55 J3.3
SPI_A_MISO  (via drill 0.33)
  Top 0.203: 37.47,28.96 38.1,28.32 U$3.7 | J1.2 54.08,30.58 52.45,28.96 v44.32,28.96 | v41.02,28.96 37.47,28.96 | U1.17 9.35,31.55 10.29,30.61 35.81,30.61 37.34,29.08 37.47,28.96
  Bottom 0.203: v44.32,28.96 v41.02,28.96
SPI_A_MOSI  (via drill 0.33)
  Top 0.203: U1.20 11.3,32.64 12.32,31.62 28.19,31.62 v28.45,31.88 | J3.2 54.08,24.92 53.47,25.53 50.42,25.53 48.77,23.88 31.62,23.88 30.48,25.02 U$3.4
  Bottom 0.203: U$3.4 30.48,30.23 28.83,31.88 v28.45,31.88
SPI_B_CLK
  Top 0.203: U2.15 10.74,18.62 11.94,19.81 11.94,21.72 JP2.6
SPI_B_CS
  Top 0.203: U2.13 12.04,16.79 12.19,16.64 14.22,16.64 14.48,16.89 14.48,24.89 U$2.5
SPI_B_MISO
  Top 0.203: U2.14 11.38,16.69 11.94,16.13 14.48,16.13 14.99,16.64 14.99,26.42 U$2.6
SPI_B_MOSI
  Top 0.203: JP2.5 13.21,19.68 12.7,19.18 U2.12
STANDBY0  (via drill 0.33)
  Top 0.203: U3.15 26.31,14.12 27.56,15.37 27.56,19.43 28.7,20.57 28.7,21.59 v28.32,21.97 | v28.07,24.26 27.56,24.26 26.67,25.15 26.67,28.57 v25.91,29.34 | v25.91,32.51 30.99,37.59 v30.99,45.59 | U$1.LS32 38.99,49.99 38.99,47.88 36.7,45.59 v32.89,45.59
  Bottom 0.203: v28.32,21.97 28.32,24 v28.07,24.26 | v25.91,29.34 v25.91,32.51 | v30.99,45.59 v32.89,45.59
STANDBY1  (via drill 0.33)
  Top 0.203: U4.15 46.89,14.12 47.88,15.11 47.88,19.94 46.86,20.95 v46.86,22.23 | v46.86,30.61 46.86,36.96 44.83,38.99 44.83,43.94 41.02,47.75 41.02,49.91 42,50.89 U$1.LS34
  Bottom 0.203: v46.86,22.23 v46.86,30.61
SYS_DCIN  (via drill 0.33, 0.56)
  Top 0.203: U4.22 50.37,4.9 | 46.61,1.14 v30.1,1.14 | v30.23,4.83 30.23,5.08 29.79,5.51 U3.22 | C16.1 61.09,27.18
  Top 0.406: v61.21,36.2 61.21,46.1 60.56,46.75 C17.1 51.04,46.75 50.04,47.75 50.04,51.44 49.28,52.2 46.61,52.2 46.48,52.07 45.97,51.03 U$1.LS38 U$1.LS36 | v61.21,33.91 61.09,33.78 61.09,27.18 61.09,23.5 57.53,19.94 57.53,11.18 56.52,10.16 56.52,2.16 55.75,1.4 54.24,1.4 C8.1 54.23,1.14 53.09,1.14 | 53.09,1.14 46.61,1.14 | 50.37,4.9 50.37,3.86 53.09,1.14
  Bottom 0.203: v30.1,1.14 30.1,4.7 v30.23,4.83
  Bottom 0.406: v61.21,36.2 v61.21,33.91 | C9.1 29.84,0.89 v30.1,1.14
TLE_RX  (via drill 0.33)
  Top 0.203: U1.13 6.76,31.14 v6.35,30.73 | v1.4,8.89 1.4,5.71 2.54,4.57 5.84,4.57 6.6,5.33 JP10.3
  Bottom 0.203: v6.35,30.73 6.22,30.73 5.71,30.23 1.78,30.23 0.89,29.34 0.89,11.43 1.4,10.92 v1.4,8.89
TLE_TX  (via drill 0.33)
  Top 0.203: U1.12 6.1,31.5 v5.46,30.86 | v0.76,10.54 4.06,7.24 JP10.4
  Bottom 0.203: v5.46,30.86 1.52,30.86 0.38,29.72 0.38,10.92 v0.76,10.54
UART0_RX
  Top 0.203: U1.8 6.76,42.19 8.13,43.56 14.73,43.56 16,44.83 U$1.LS7
UART0_TX
  Top 0.203: U1.9 6.1,42.29 7.87,44.07 12.57,44.07 14,45.5 U$1.LS5
UART1_RX  (via drill 0.33)
  Top 0.203: U1.6 8.05,41.58 8.76,42.29 v13.97,42.29
  Bottom 0.203: v13.97,42.29 18.67,42.29 22,45.62 U$1.LS13
UART1_TX  (via drill 0.33)
  Top 0.203: U1.7 7.42,41.83 8.51,42.93 v14.73,42.93
  Bottom 0.203: v14.73,42.93 18.54,42.93 20,44.38 U$1.LS11
USB_D+  (via drill 0.33)
  Top 0.203: U$4.8 72.01,9.78 72.9,10.67 v72.9,13.08
  Bottom 0.203: v72.9,13.08 72.9,13.21 70.61,15.49 58.17,15.49 JP9.3 55.12,17.78 46.74,17.78 44.45,15.49 41.78,15.49 41.15,14.86 U$1.HS51
USB_D-  (via drill 0.33)
  Top 0.203: v72.14,13.08 72.14,10.79 71.62,10.28 U$4.7
  Bottom 0.203: 41.91,13.34 41.91,14.48 42.29,14.86 44.7,14.86 46.48,16.64 54.48,16.64 JP9.2 56.13,14.99 70.36,14.99 72.14,13.21 v72.14,13.08 | 41.91,13.34 41.91,13.29 | U$1.HS53 41.95,13.29 41.91,13.34
VCORE
  Top 0.203: 83.26,7.78 C106.1 | C107.1 70.74,17.13 70.74,15.93 U$4.64 71.56,14.03 71.75,13.84 76.2,13.84 78.61,11.43 | C28.1 67.71,7.78 U$4.12 78.01,7.78 78.61,8.38 | 83.19,7.86 83.11,7.78 U$4.37 79.08,7.78 78.61,8.26 78.61,8.38 | 78.61,8.38 78.61,11.43 | 78.61,11.43 78.61,13.21 79.12,13.72 79.12,15.05 U$4.49 C29.1
  Top 0.406: 83.26,7.78 83.19,7.86 | C29.1 80.77,15.11
VDDIO  (via drill 0.33)
  Top 0.203: 71.25,25.27 JP1.1 68.33,28.19 v61.98,28.19 | v54.23,26.8 55.24,27.81 v60.2,27.81
  Bottom 0.203: J3.1 54.2,26.8 v54.23,26.8 | v60.2,27.81 60.58,28.19 v61.98,28.19
VPHY
  Top 0.203: U$4.4 64.73,11.78 C104.1 C105.1 63.48,11.68 L2.2
VPLL
  Top 0.203: U$4.9 68.59,9.28 68.2,8.89 64.88,8.89 C103.1 C102.1 62.09,8.65 L1.2

## Text on the board
tPlace: BMP180 | BARO | SJ1
bPlace: VDDIO | VDD | GND | SCL | SDA | VDDIO | AD0 / SDO | !CS | INT